# Altium PCB PCB1.PcbDoc
Units mil, origin at the board's own origin, x right, y up, seen from the top; angles counter-clockwise.
Board outline 6000 x 4000 mil, 2 copper layers (Top Layer, Bottom Layer); 2 components, 0 nets, 34 pads, 0 vias.
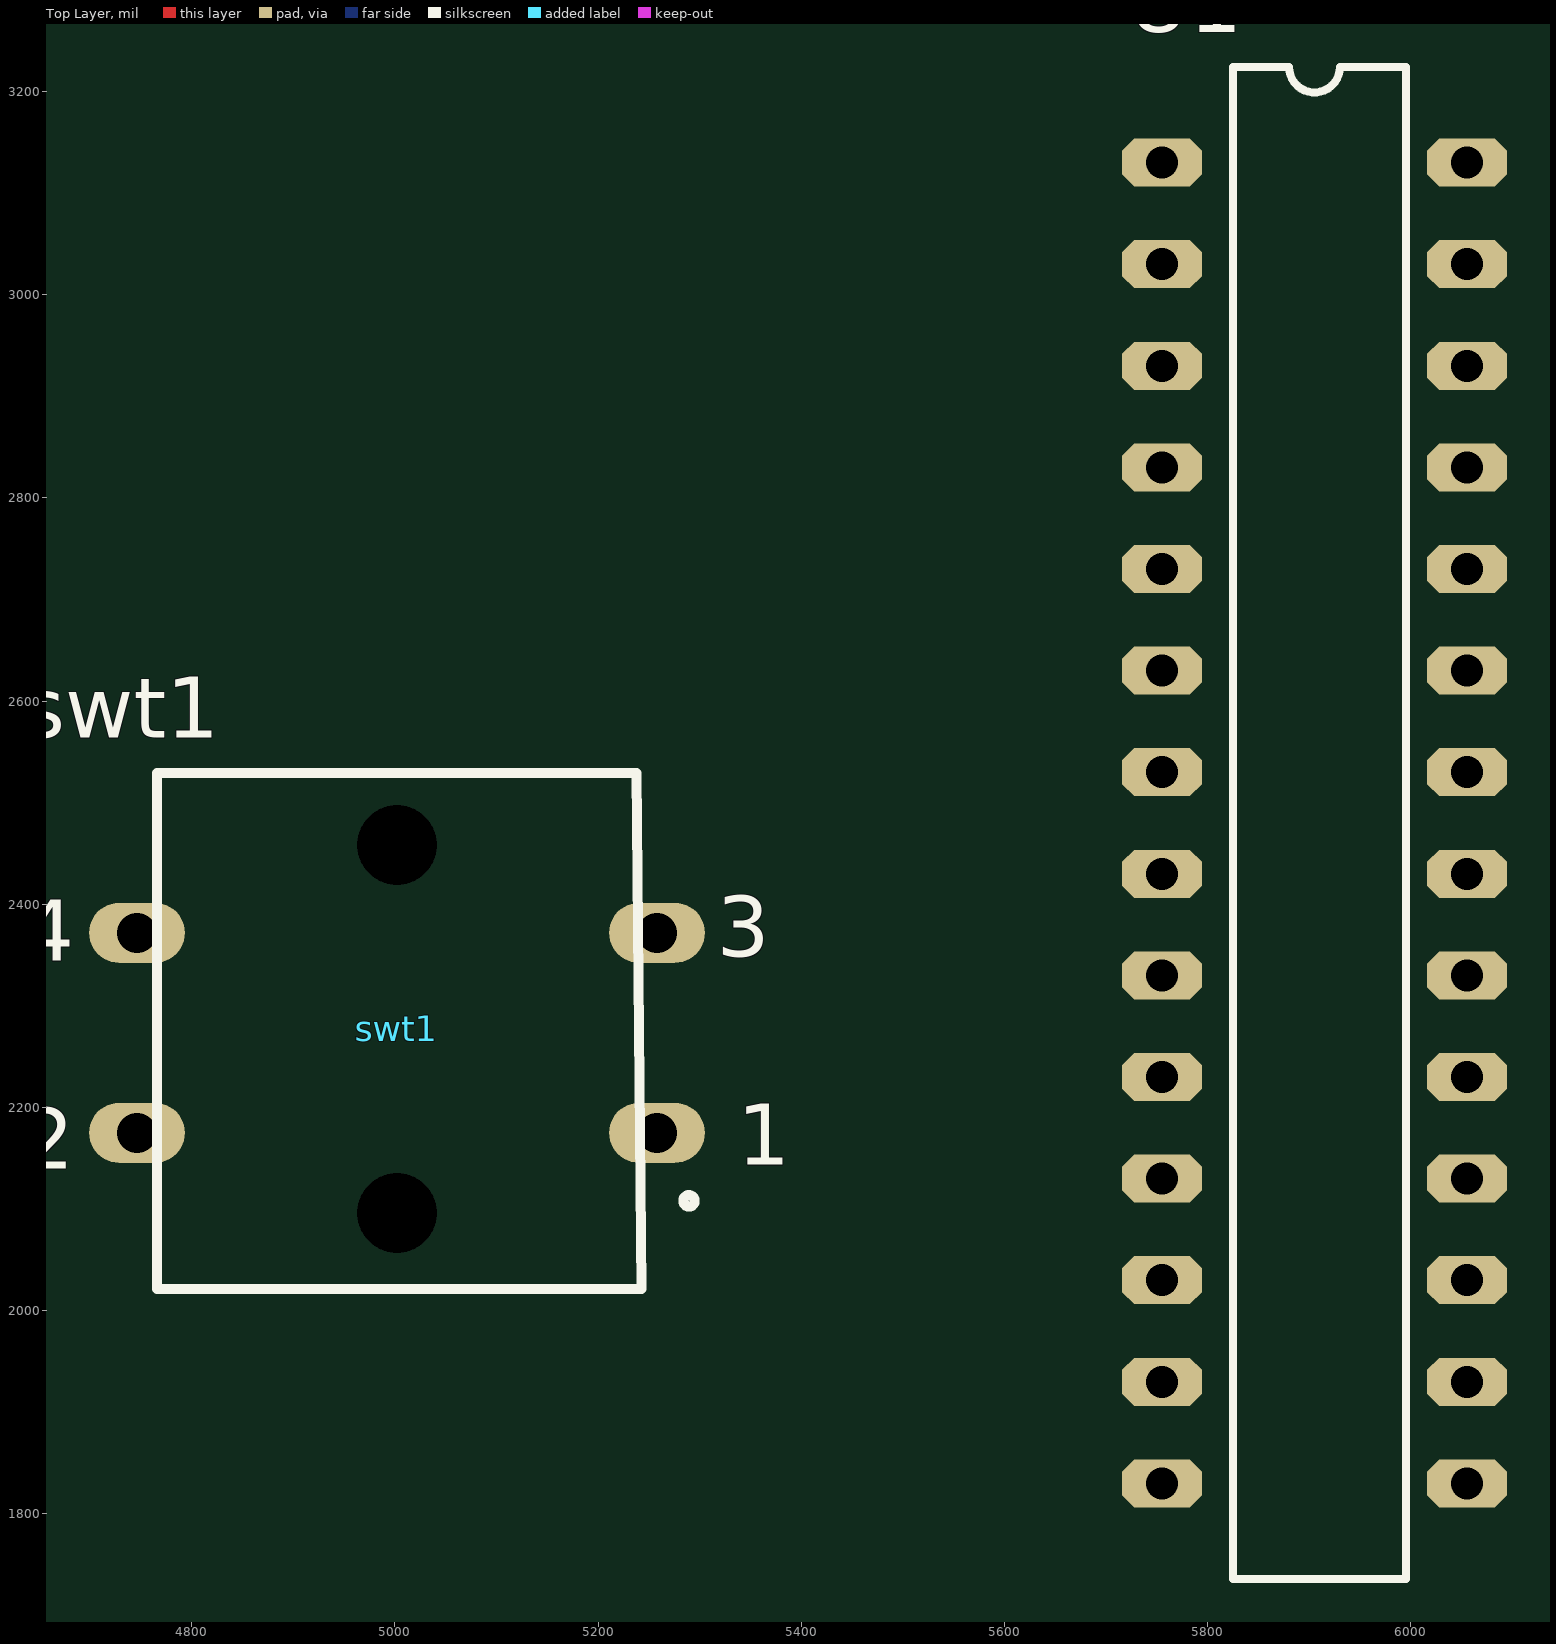
[diagram p0: Top Layer view]
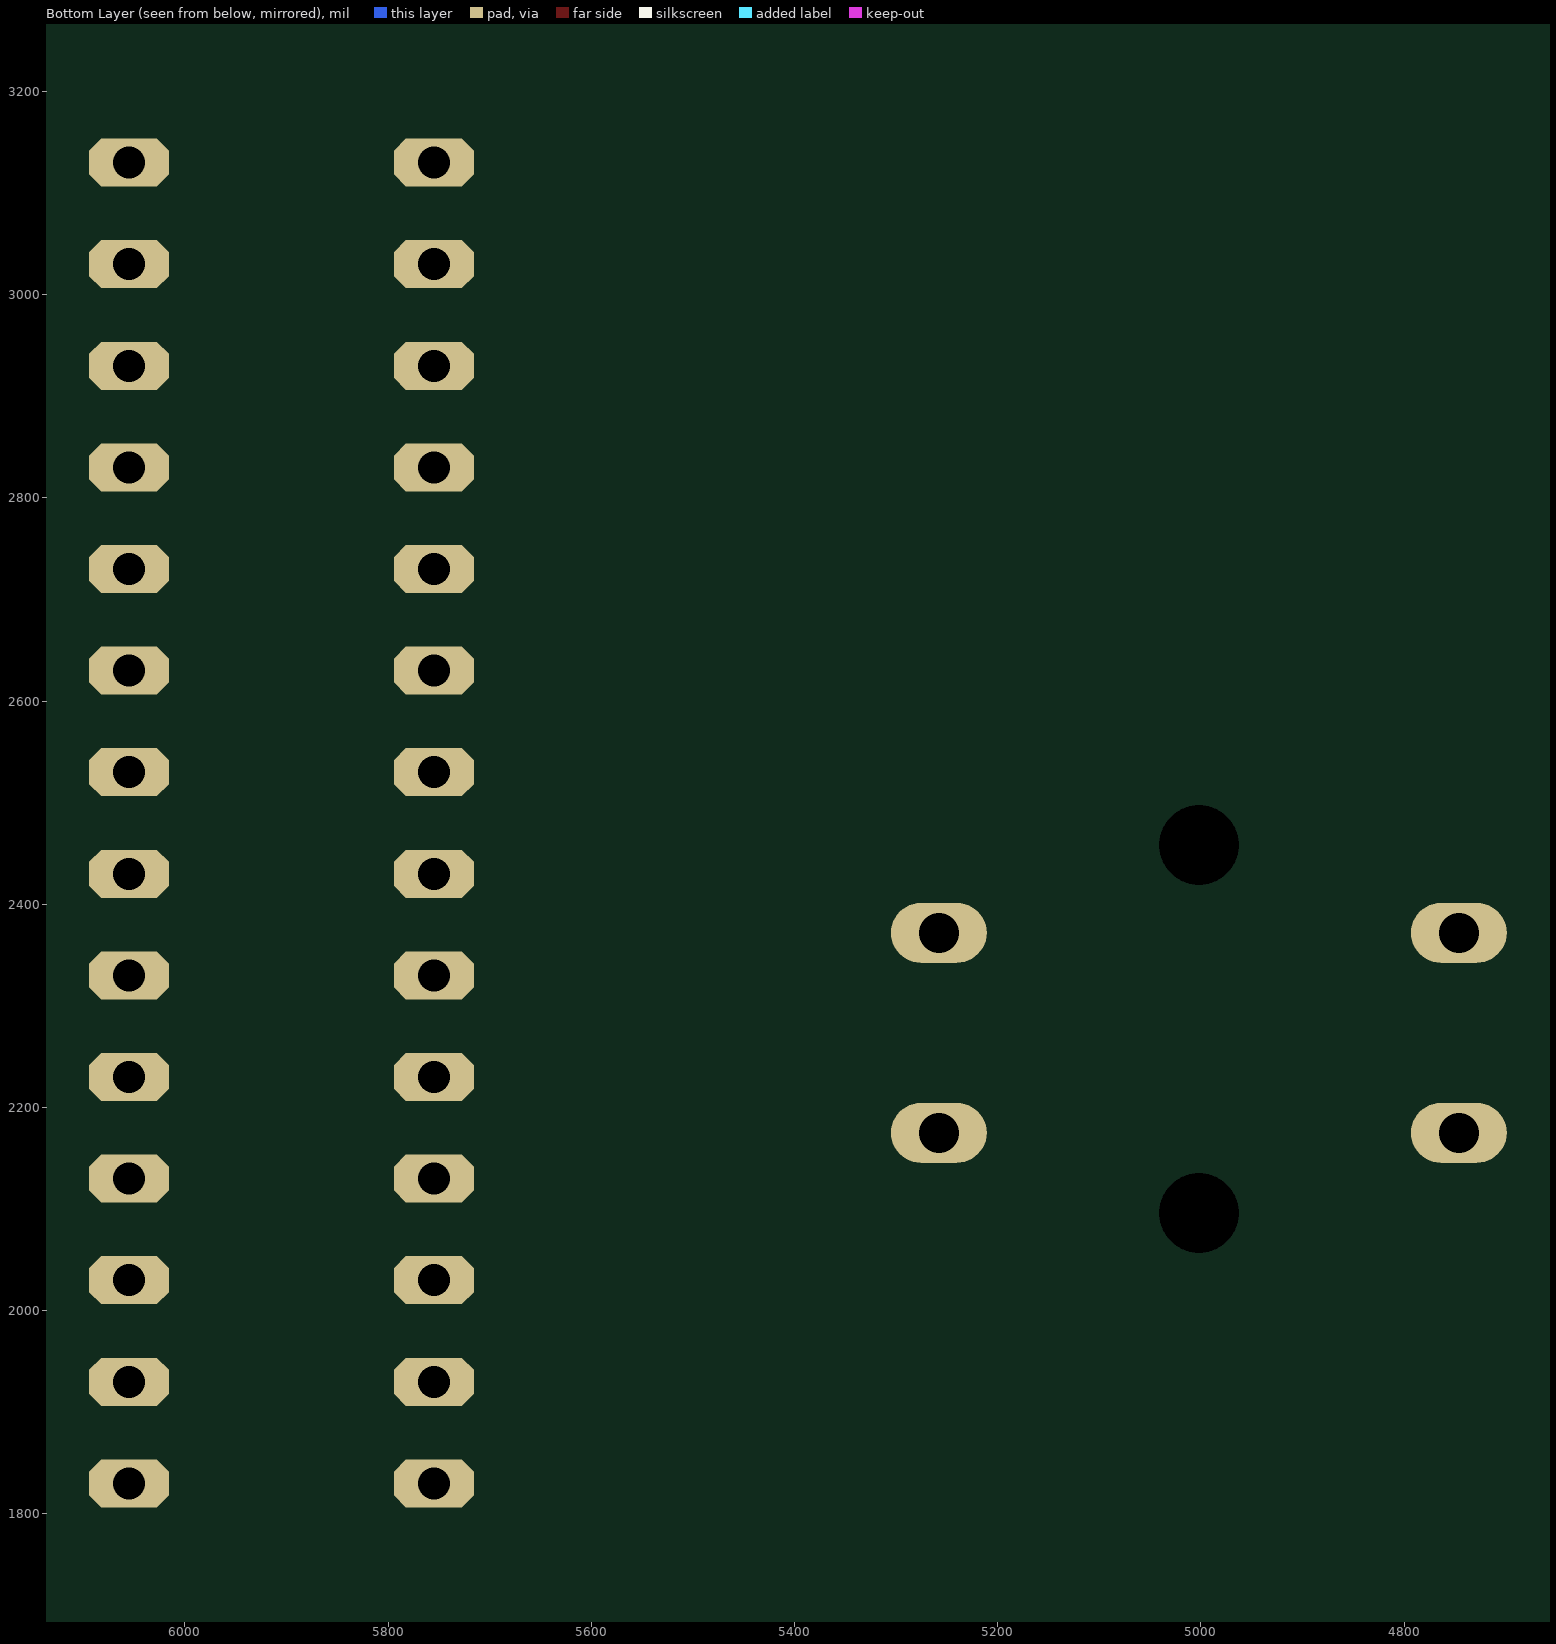
[diagram p1: Bottom Layer view, seen from below]

## Layer stack, top to bottom
Top Layer: signal copper 1.4
Dielectric: dielectric 12.6, FR-4, Dk 4.8
Bottom Layer: signal copper 1.4

## Board outline
1000,1000 7000,1000 7000,5000 1000,5000

## Design rules (kind name [scope] priority, off if disabled: settings)
Clearance [All] p1: gap=10
PolygonConnect [All] p1: connectstyle=Relief reliefconductorwidth=10 reliefentries=4 polygonreliefangle="90 Angle" airgapwidth=10
RoutingVias [All] p1: holewidth=28 width=50 viastyle="Through Hole" minholewidth=28 minwidth=50 maxholewidth=28 maxwidth=50
SolderMaskExpansion [All] p1: expansion=4
Width [All] p1: maxlimit=10 minlimit=10 preferedwidth=10
28 further rules are at their usual default settings.

## Components (designator, comment, footprint, x,y, rotation, side; value= is the part's Value field where it differs from the comment)
swt1 "OMRON TACTILE" SW? 5250,2175 r0 top
U1 "ATMEGA8_DASHTIPOUR_4 PART" PCBComponent_1 37005,34515 r0 top

## Footprints (in the part's own frame and the unit in brackets; to place one, negate y for a bottom-side part, rotate by r counter-clockwise, add the part's x,y. Pads: shape width x height; smd on the part's side, far side on the other; paste and mask are expansions set on the pad)
PCBComponent_1 [mm]
  oct 2x1.2 hole 0.8: 1(-793.75,-797.179) 2(-793.75,-799.719) 3(-793.75,-802.259) 4(-793.75,-804.799) 5(-793.75,-807.339) 6(-793.75,-809.879) 7(-793.75,-812.419) 8(-793.75,-814.959) 9(-793.75,-817.499) 10(-793.75,-820.039) 11(-793.75,-822.579) 12(-793.75,-825.119) 13(-793.75,-827.659) 14(-793.75,-830.199) 15(-786.13,-830.199) 16(-786.13,-827.659) 17(-786.13,-825.119) 18(-786.13,-822.579) 19(-786.13,-820.039) 20(-786.13,-817.499) 21(-786.13,-814.959) 22(-786.13,-812.419) 23(-786.13,-809.879) 24(-786.13,-807.339) 25(-786.13,-804.799) 26(-786.13,-802.259) 27(-786.13,-799.719) 28(-786.13,-797.179)
  silkscreen extent -791.97,-832.59 -787.65,-794.79, body extent -793.75,-831.24 -785.93,-796.19, height 6.57
SW? [mm] "OMRON B3F"
  oval 2.4x1.5 hole 1: 0(-12.8,5) 1(-12.8,0) 1(0.2,0) 1(0.2,5)
  round 0 hole 2: 2(-6.3,7.2) 3(-6.3,-2)
  silkscreen extent -12.3,-3.9 1.14,9, body extent -13.2,-3.4 0.6,8.6, height 4.3

## Part data
swt1: library part "OMRON TACTILE_1", "omron tactile"
U1: "ATMEGA 8"

## Nets (pads, with @x,y where several pads share a name; then routed paths per layer and width w, separated by ;. In a path a pad name is that pad's centre, name@x,y a point inside that pad or via, vN(x,y) a via of type N, cw(c..) or ccw(c..) an arc to the next point about the centre after c; other vN are vias at no path point)
pads on no net: swt1.0 swt1.1 swt1.2 swt1.3 U1.1 U1.2 U1.3 U1.4 U1.5 U1.6 U1.7 U1.8 U1.9 U1.10 U1.11 U1.12 U1.13 U1.14 U1.15 U1.16 U1.17 U1.18 U1.19 U1.20 U1.21 U1.22 U1.23 U1.24 U1.25 U1.26 U1.27 U1.28

## Text inside footprints (layer, text, board x,y; h text height)
swt1: Top Overlay "3" at 5316.93,2348.23 h60; Top Overlay "4" at 4631.89,2344.29 h60; Top Overlay "2" at 4631.89,2139.57 h60; Top Overlay "1" at 5336.92,2143.5 h60